# Altium PCB Terminators.PcbDoc
Units mil, origin at the board's own origin, x right, y up, seen from the top; angles counter-clockwise.
Board outline 1400 x 800 mil, 2 copper layers (Top Layer, Bottom Layer); 6 components, 5 nets, 21 pads, 0 vias.
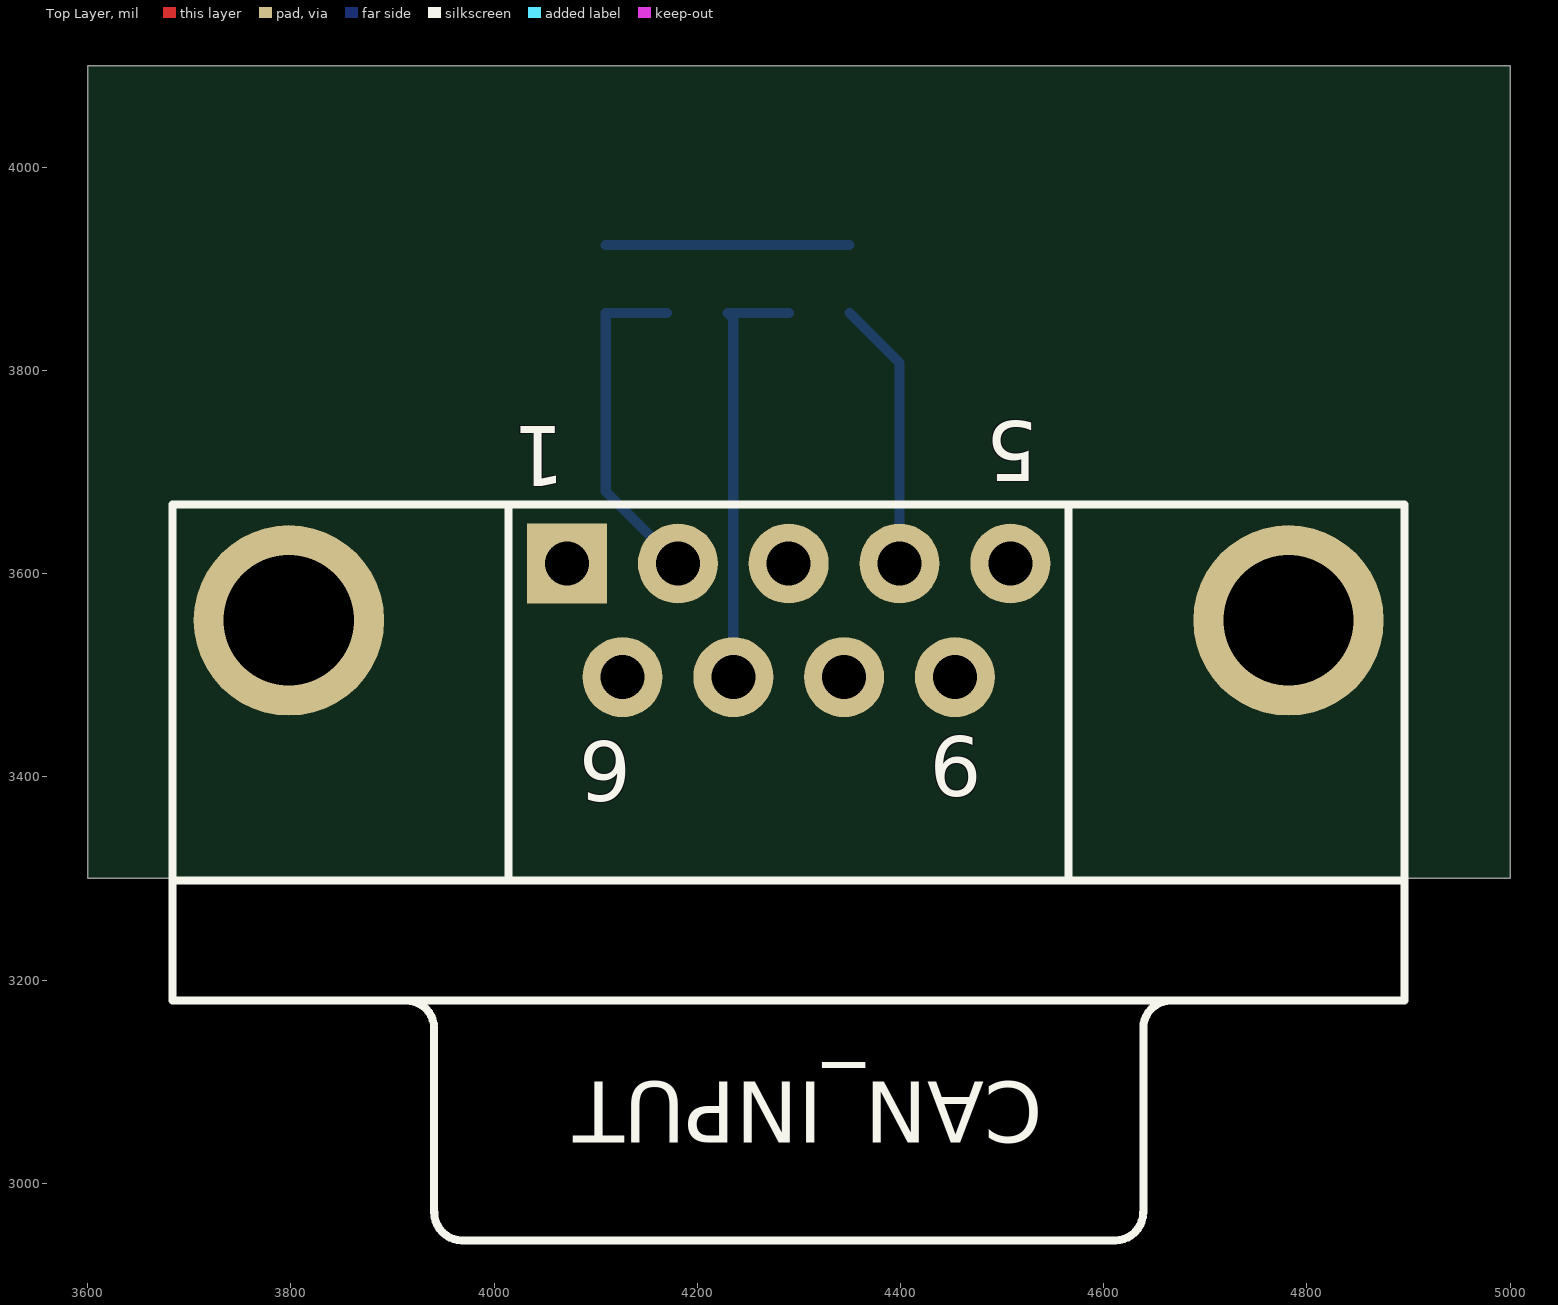
[diagram p0: Top Layer view]
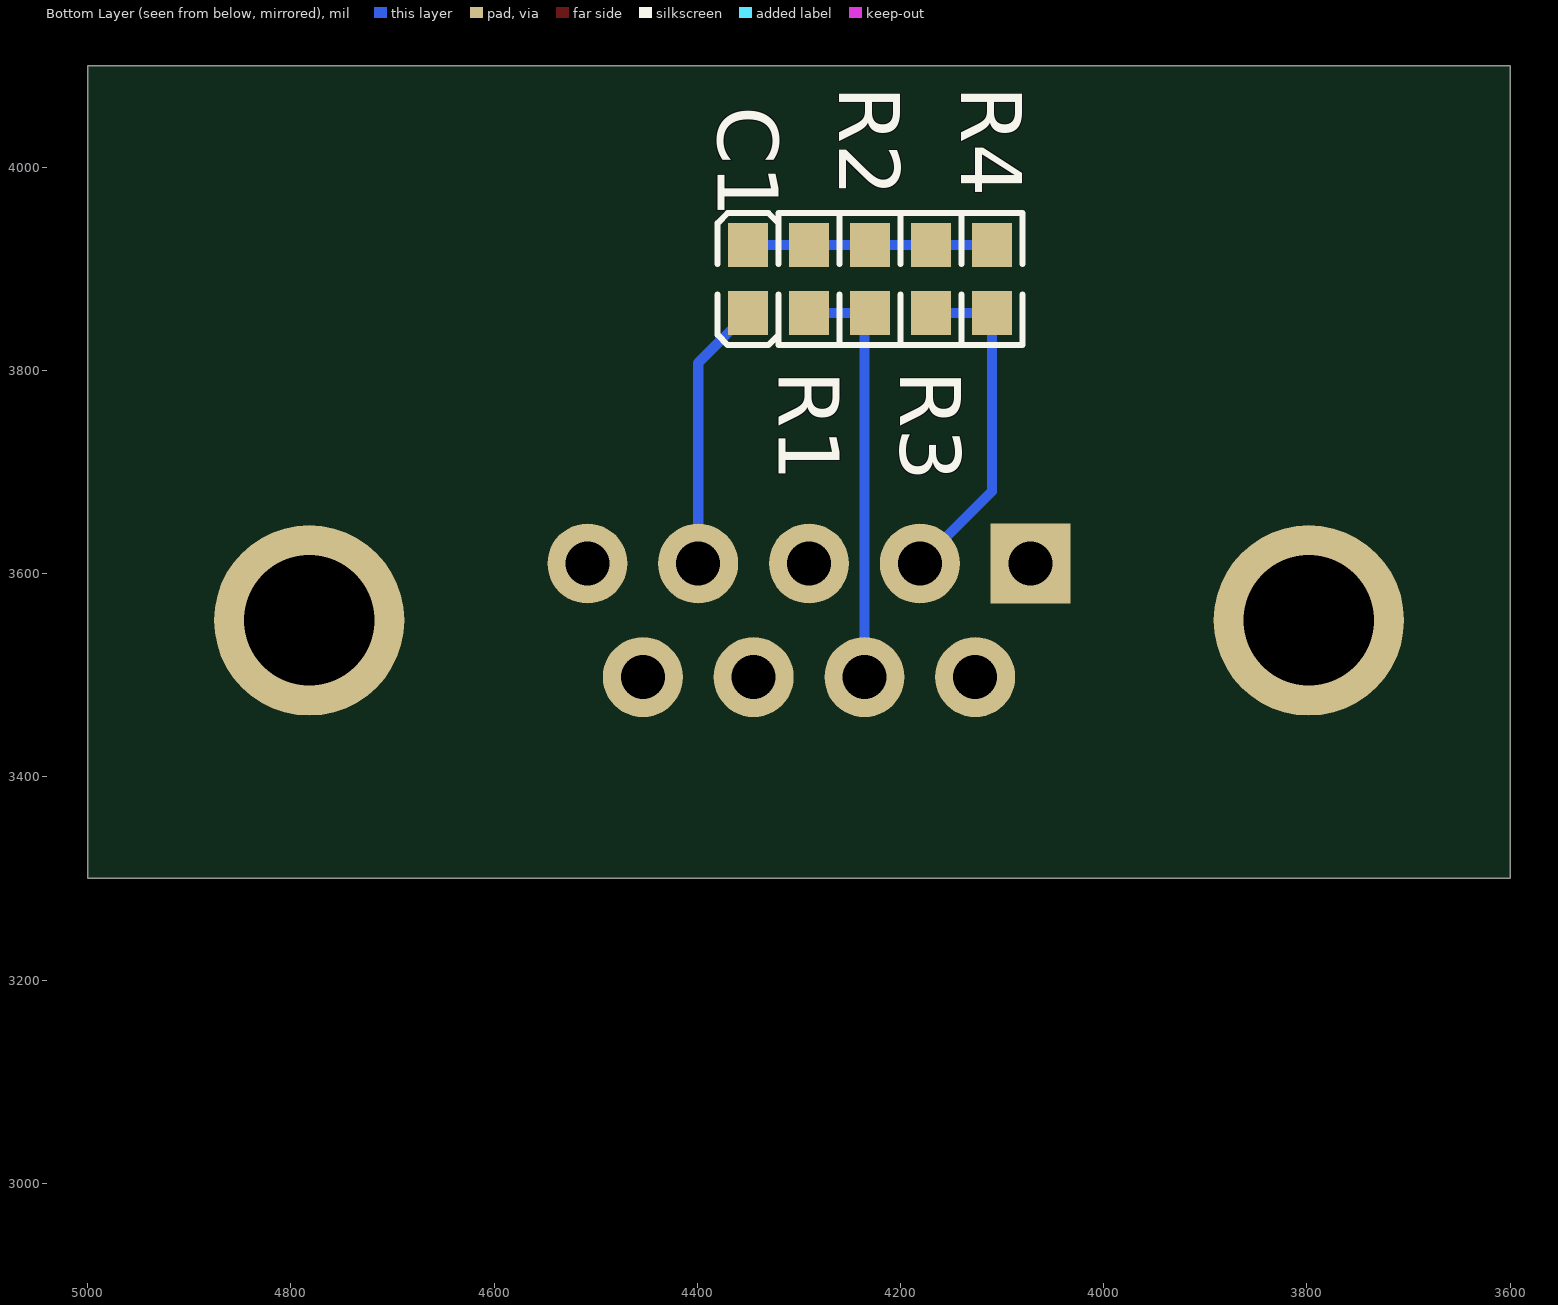
[diagram p1: Bottom Layer view, seen from below]

## Layer stack, top to bottom
Top Layer: signal copper 1.4
Dielectric: dielectric 12.6, FR-4, Dk 4.8
Bottom Layer: signal copper 1.4

## Board outline
3600,3300 3600,4100 5000,4100 5000,3300

## Design rules (kind name [scope] priority, off if disabled: settings)
Clearance [All] p1: gap=10
PolygonConnect [All] p1: connectstyle=Relief reliefconductorwidth=10 reliefentries=4 polygonreliefangle="90 Angle"
RoutingVias [All] p1: holewidth=28 width=50 viastyle="Through Hole" minholewidth=28 minwidth=50 maxholewidth=28 maxwidth=50
SilkscreenOverComponentPads [All] p1: minsilkscreentomaskgap=10
SolderMaskExpansion [All] p1: expansion=4
Width [All] p1: maxlimit=10 minlimit=10 preferedwidth=10
27 further rules are at their usual default settings.

## Components (designator, comment, footprint, x,y, rotation, side; value= is the part's Value field where it differs from the comment)
C1 "10nF" CC0603 4350,3890 r90 bottom
CAN_INPUT "DB9_male" db9_male 4290,3180 r180 top
R1 "120R" R0603 4290,3890 r90 bottom
R2 "120R" R0603 4230,3890 r90 bottom
R3 "120R" R0603 4170,3890 r270 bottom
R4 "120R" R0603 4110,3890 r270 bottom

## Footprints (in the part's own frame and the unit in brackets; to place one, negate y for a bottom-side part, rotate by r counter-clockwise, add the part's x,y. Pads: shape width x height; smd on the part's side, far side on the other; paste and mask are expansions set on the pad)
CC0603 [mm] "Chip Capacitor; Body 1.6 x 0.8 mm (LxW typ)"
  rect 1.1x1 smd: 1(-0.85,0) 2(0.85,0)
  silkscreen extent -1.65,-0.76 1.65,0.76, body extent -1.5,-0.6 1.5,0.6, height 1.35
db9_male [mm] "Connector; D Subminiature; 9 Position; Right Angle; Pitch 1.385 mm"
  rect 2x2 hole 1.1: 1(5.54,-10.92)
  round 2 hole 1.1: 2(2.77,-10.92) 3(0,-10.92) 4(-2.77,-10.92) 5(-5.54,-10.92) 6(4.155,-8.08) 7(1.385,-8.08) 8(-1.385,-8.08) 9(-4.155,-8.08)
  round 4.76 hole 3.26: 10(-12.495,-9.5) 11(12.495,-9.5)
  silkscreen extent -15.4,-12.4 15.4,6
R0603 [mm] "Chip Resister; Body 1.6 x 0.8 mm (LxW typ)"
  rect 1.1x1 smd: 1(-0.85,0) 2(0.85,0)
  silkscreen extent -1.65,-0.76 1.65,0.76, body extent -1.5,-0.6 1.5,0.6, height 1.35

## Part data
C1: library part 10nF_CC0603, "0603 Capacitor"
CAN_INPUT: library part db9_male, "DB9 Male Connecter"
R1 R2 R3 R4: library part 120R_R0603, "0603 Resistor"

## Nets (pads, with @x,y where several pads share a name; then routed paths per layer and width w, separated by ;. In a path a pad name is that pad's centre, name@x,y a point inside that pad or via, vN(x,y) a via of type N, cw(c..) or ccw(c..) an arc to the next point about the centre after c; other vN are vias at no path point)
CANH: CAN_INPUT.7 R1.1 R2.1 | length 420.7
  Bottom Layer w10: CAN_INPUT.7 4235.47,3851.06 R2.1 R1.1
CANL: CAN_INPUT.2 R3.2 R4.2 | length 336
  Bottom Layer w10: R3.2 R4.2 4110,3680.87 CAN_INPUT.2
GND: C1.1 CAN_INPUT.4 | length 266.9
  Bottom Layer w10: C1.1 4399.06,3807.48 CAN_INPUT.4
NetC1_2: C1.2 R1.2 R2.2 R3.1 R4.1 | length 240
  Bottom Layer w10: R4.1 R3.1 R2.2 R1.2 C1.2
V_IN: CAN_INPUT.9
pads on no net: CAN_INPUT.1 CAN_INPUT.3 CAN_INPUT.5 CAN_INPUT.6 CAN_INPUT.8 CAN_INPUT.10 CAN_INPUT.11

## Polygon pours and split planes (outlines as drawn)
no net on Mechanical 1 "Outline" (none): 3600,3300 5000,3300 5000,4100 3600,4100

## Text inside footprints (layer, text, board x,y; h text height)
CAN_INPUT: Top Overlay "1" at 4070,3745 h59.06 r180; Top Overlay "5" at 4535,3750 h59.06 r180; Top Overlay "9" at 4480,3440 h59.06 r180; Top Overlay "6" at 4135,3435 h59.06 r180